# EAGLE board wiseboard (EAGLE 8.2.2)
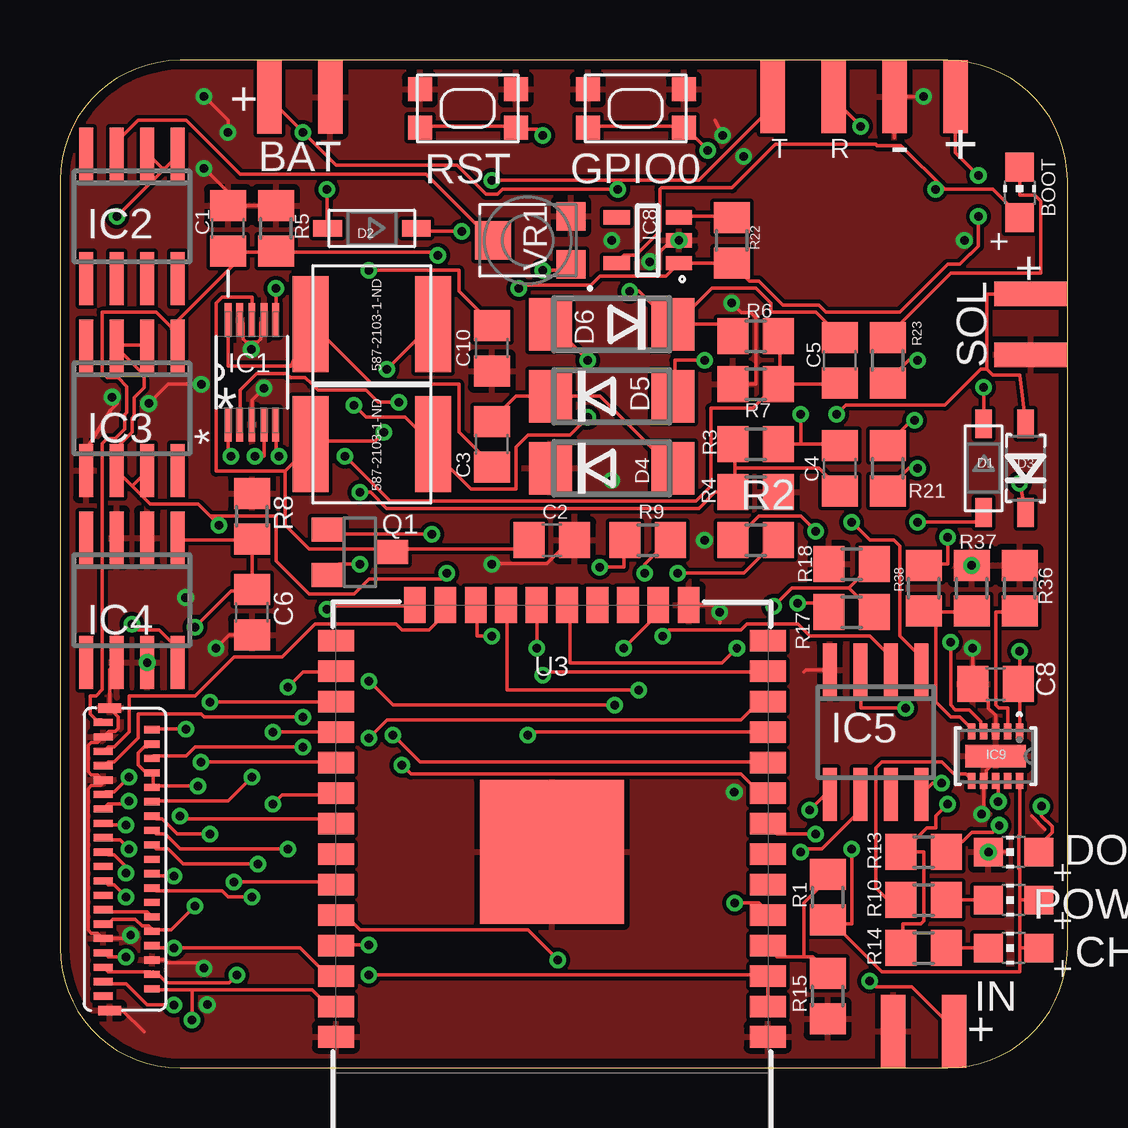
[diagram p0: board, top side]
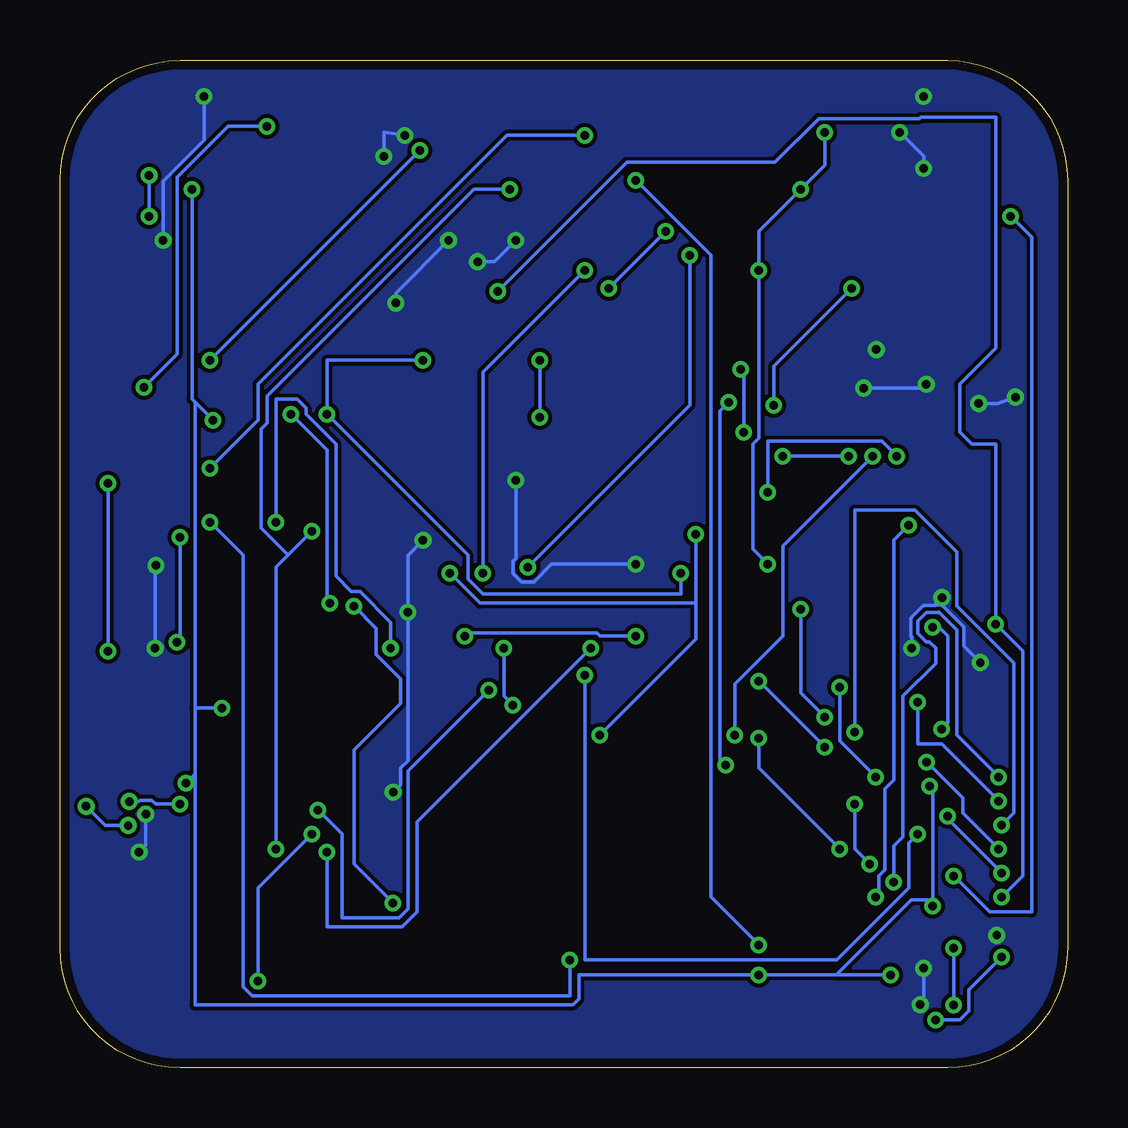
[diagram p1: board, bottom side, seen from below]

Size 42 x 42 mm. Coordinates in mm from the lower left corner, seen from the top.
Outline: 42,5 42,37 arc90 37,42 5,42 arc90 0,37 0,5 arc90 5,0 37,0 arc90 42,5
Copper layers (1*16): Top 0.0356mm / dielectric 1.5011mm / Bottom 0.0356mm
Design rules "oshpark-2layer": minimum track width 6mil, minimum drill 13mil, track to track 6mil, track to pad 6mil, pad to pad 6mil, via to via 6mil, smd to smd 6mil, copper to edge 15mil, drill to drill 6mil, minimum pad ring 7mil, minimum via ring 7mil, stop-mask expansion 2.5mil, vias tented up to drill 0mil, thermal gap 10mil

## Footprints (pad centres in the part's own frame; a part is rotated, then mirrored left to right if it is on the bottom)
587-2103-1-ND = smd 1.5 x 4: P$1 -2.55,0; P$2 2.55,0
CHIP-LED0805 = smd 1.2 x 1.2: A 0,-1.05; C 0,1.05
C0805 = smd 1.3 x 1.5: 1 -0.95,0; 2 0.95,0
SOD-123 = smd 1.2 x 0.7: A 1.85,0; C -1.85,0
DO214AA = smd 1.8 x 2.2: A 2.55,0; C -2.55,0
SOP50P490X110-10N = smd 1.397 x 0.279: 1 -2.184,0.991; 2 -2.184,0.508; 3 -2.184,0; 4 -2.184,-0.508; 5 -2.184,-0.991; 6 2.184,-0.991; 7 2.184,-0.508; 8 2.184,0; 9 2.184,0.508; 10 2.184,0.991
SO08 = smd 0.6 x 2.2: 1 -1.905,-2.6; 2 -0.635,-2.6; 3 0.635,-2.6; 4 1.905,-2.6; 5 1.905,2.6; 6 0.635,2.6; 7 -0.635,2.6; 8 -1.905,2.6
SO8 = smd 0.6 x 2.2: 1 -1.905,-2.6; 2 -0.635,-2.6; 3 0.635,-2.6; 4 1.905,-2.6; 5 1.905,2.6; 6 0.635,2.6; 7 -0.635,2.6; 8 -1.905,2.6
SOT95P280X145-5N = smd 1.1 x 0.6: 1 -1.3,0.95; 2 -1.3,0; 3 -1.3,-0.95; 4 1.3,-0.95; 5 1.3,0.95
DQC10_P84X2P4 = smd 0.66 x 0.305: 1 -1.029,1; 2 -1.029,0.5; 3 -1.029,0; 4 -1.029,-0.5; 5 -1.029,-1; 6 1.029,-1; 7 1.029,-0.5; 8 1.029,0; 9 1.029,0.5; 10 1.029,1 | smd 0.94 x 2.515: 11 0,0
EDGE_CON_2 = smd 1.016 x 3.048: 1 1.27,1.524; 2 -1.27,1.524
EDGE_CON_4 = smd 1.016 x 3.048: 1 2.54,0.254; 2 0,0.254; 3 -5.08,0.254; 4 -2.54,0.254
SOT23 = smd 1 x 1.4: 1 -0.95,-1.306; 2 0.95,-1.306; 3 0,1.306
R0805 = smd 1.3 x 1.5: 1 -0.95,0; 2 0.95,0
KMR2 = smd 1 x 1: 1 2,0.8; 2 2,-0.8; 3 -2,0.8; 4 -2,-0.8
ESP-WROOM-03 = smd 0.9 x 1.5: 1 7.7,9; 2 6.43,9; 3 5.16,9; 4 3.89,9; 5 2.62,9; 6 1.35,9; 7 0.08,9; 8 -1.19,9; 9 -2.46,9; 10 -3.73,9; 11 -5,9; 12 -6.27,9; 13 -7.54,9; 14 -8.81,9; 25 -8.81,-9; 26 -7.54,-9; 27 -6.27,-9; 28 -5,-9; 29 -3.73,-9; 30 -2.46,-9; 31 -1.19,-9; 32 0.08,-9; 33 1.35,-9; 34 2.62,-9; 35 3.89,-9; 36 5.16,-9; 37 6.43,-9; 38 7.7,-9 | smd 1.5 x 0.9: 15 -10.3,5.715; 16 -10.3,4.445; 17 -10.3,3.175; 18 -10.3,1.905; 19 -10.3,0.635; 20 -10.3,-0.635; 21 -10.3,-1.905; 22 -10.3,-3.175; 23 -10.3,-4.445; 24 -10.3,-5.715 | smd 6 x 6: GND 0,0
HFQ339CT-ND = smd 0.4 x 0.95: GND@1 6.6,-0.925; GND@2 -6,-0.925 | smd 0.3 x 0.8: P$1 -5.4,-1.2; P$3 -4.8,-1.2; P$5 -4.2,-1.2; P$7 -3.6,-1.2; P$9 -3,-1.2; P$11 -2.4,-1.2; P$13 -1.8,-1.2; P$15 -1.2,-1.2; P$17 -0.6,-1.2; P$19 0,-1.2; P$21 0.6,-1.2; P$23 1.2,-1.2; P$25 1.8,-1.2; P$27 2.4,-1.2; P$29 3,-1.2; P$31 3.6,-1.2; P$33 4.2,-1.2; P$35 4.8,-1.2; P$37 5.4,-1.2; P$39 6,-1.2 | smd 0.3 x 0.65: P$2 -5.1,0.838; P$4 -4.5,0.838; P$6 -3.9,0.838; P$8 -3.3,0.838; P$10 -2.7,0.838; P$12 -2.1,0.838; P$14 -1.5,0.838; P$16 -0.9,0.838; P$18 -0.3,0.838; P$20 0.3,0.838; P$22 0.9,0.838; P$24 1.5,0.838; P$26 2.1,0.838; P$28 2.7,0.838; P$30 3.3,0.838; P$32 3.9,0.838; P$34 4.5,0.838; P$36 5.1,0.838; P$38 5.7,0.838
TRIM_TC33X-2-103E = smd 1.2 x 1.2: 1 -1.8,1; 3 -1.8,-1 | smd 1.5 x 1.6: 2 1.45,0

## Placement (x,y rotation side)
22  587-2103-1-ND  [587-2103-1-ND]  13,31 180 top
BOOT  LED1  [CHIP-LED0805]  40,36.5 0 top
C1  1uF  [C0805]  7,35 90 top
C2  1uF  [C0805]  20.5,22 0 top
C3  1uF  [C0805]  18,26 90 top
C4  10uF  [C0805]  32.5,25 270 top
C5  10uF  [C0805]  32.5,29.5 270 top
C6  1uF  [C0805]  8,19 270 top
C8  10uF  [C0805]  39,16 0 top
C10  10uF  [C0805]  18,30 90 top
CHRG/LBO  LED3  [CHIP-LED0805]  39.75,5 90 top
D1  MBR120VLSFT1G  [SOD-123]  40.25,25 90 top
D2  MBR120  [SOD-123]  13,35 180 top
D3  1n4148  [SOD-123]  38.5,25 270 top
D4  SS24  [DO214AA]  23,25 0 top
D5  SS24  [DO214AA]  23,28 0 top
D6  SS24  [DO214AA]  23,31 180 top
DONE  LED4  [CHIP-LED0805]  39.75,9 90 top
IC1  LT1945  [SOP50P490X110-10N]  8,29 90 top
IC2  LM358  [SO08]  3,35.5 180 top
IC3  L79L15  [SO8]  3,27.5 180 top
IC4  L78L15  [SO8]  3,19.5 180 top
IC5  W25Q  [SO8]  34,14 180 top
IC8  IC6  [SOT95P280X145-5N]  24.5,34.5 180 top
IC9  BQ24210DQCT  [DQC10_P84X2P4]  39,13 270 top
J1  BAT_CON  [EDGE_CON_2]  10,42 180 top
J2  SOL_CON  [EDGE_CON_2]  42,31 90 top
J3  PROG_HEADER  [EDGE_CON_4]  32.25,40.75 180 top
J4  BUT_CON  [EDGE_CON_2]  36,0 0 top
POWERGOOD  LED2  [CHIP-LED0805]  39.75,7 90 top
Q1  IRLM  [SOT23]  12.5,21.5 270 top
R1  10K  [R0805]  32,7.12 270 top
R2  10k  [R0805]  29,22 0 top
R3  470k  [R0805]  29,26 0 top
R4  39k  [R0805]  29,24 180 top
R5  39k  [R0805]  9,35 90 top
R6  560k  [R0805]  29,30.5 180 top
R7  39k  [R0805]  29,28.5 0 top
R8  39k  [R0805]  8,23 270 top
R9  200k  [R0805]  24.5,22 0 top
R10  1K  [R0805]  36,7 180 top
R13  1K  [R0805]  36,9 180 top
R14  1K  [R0805]  36,5 180 top
R15  10K  [R0805]  32,3 90 top
R17  10K  [R0805]  33,19 180 top
R18  10K  [R0805]  33,21 0 top
R21  10K  [R0805]  34.5,25 90 top
R22  10K  [R0805]  28,34.5 90 top
R23  1K  [R0805]  34.5,29.5 90 top
R36  790  [R0805]  40,20 270 top
R37  10k  [R0805]  38,20 270 top
R38  7.6k  [R0805]  36,20 90 top
SW1  SPST_TACT-KMR2  [KMR2]  24,40 0 top
SW2  SPST_TACT-KMR2  [KMR2]  17,40 0 top
U3  ESP-WROOM-03  [ESP-WROOM-03]  20.5,9 270 top
U$4  FH26W-39S  [HFQ339CT-ND]  3,9 270 top
U$5  587-2103-1-ND  [587-2103-1-ND]  13,26 180 top
VR1  TC33X-104ECT-ND  [TRIM_TC33X-2-103E]  19.5,34.5 180 top

## Library data of the parts
22 D4-D6 IC3-IC5 IC8 J1-J4 U$4 U$5 = WISE
BOOT CHRG/LBO D2 D3 DONE POWERGOOD SW1 SW2 = adafruit
C1-C6 C8 C10 R1-R10 R13-R15 R17 R18 R21-R23 R36-R38 = resistor
D1 = microbuilder
IC1 = LTC_By_element14_Batch_1; MPN: LT1945EMS#PBF; OC_FARNELL: 1273495; OC_NEWARK: 57M7266; PACKAGE: MSOP-10; SUPPLIER: Linear Technology
IC2 = linear
IC9 = WISE; MANUFACTURER_PART_NUMBER: BQ24210DQCT; VENDOR: Vendor
Q1 = IRLML6402; AVAILABILITY: Unavailable; DESCRIPTION: MOSFETs, Semiconductors and Actives, mosfet, Transistors, Discretes (diodes, transistors, thyristors ...); MF: International Rectifier; MP: IRLML6402; PACKAGE: SOT-23-3 International Rectifier; PRICE: None
U3 = esp32
VR1 = WISE; AVAILABILITY: Good; DESCRIPTION: Res%20Trimmer%2010K%20Ohm%2025%25%200.1W%281/10W%29%201%28Elec%29/1%28Mech%29Turn%20%283%20X%203.8mm%29%20Foot%20Print%20SMD%20Embossed%20T/R; MF: Bourns; MP: TC33X-2-103E; PACKAGE: None; PRICE: 0.16 USD

## Nets
+3V3: BOOT.A IC5.3 IC5.8 IC8.5 R21.2 U3.2 U3.3 U$4.P$4 U$4.P$8 U$4.P$10 U$4.P$29 U$4.P$30 U$4.P$35 U$4.P$36
+5V: D2.C IC8.1 J3.3 R22.1
+15V: C6.1 IC4.1 R8.2 U$4.P$2
+22V: C5.1 D6.C IC4.8 R6.2 U$4.P$23
-15V: C1.1 IC3.1 R5.1 R9.1 U$4.P$1
-20V: C4.1 D5.A IC3.2 IC3.3 IC3.6 IC3.7 R3.2 U$4.P$24
BAT_SENS: R1.1 R15.2 U3.4
BUT_CON: J4.1 U3.8
CKV: U3.37 U$4.P$33 U$4.P$38
CL: U3.23 U$4.P$5
CLK: IC5.6 U3.20
D0: U3.26 U$4.P$12
D1: U3.27 U$4.P$13
D2: U3.13 U$4.P$14
D3: U3.28 U$4.P$15
D4: U3.12 U$4.P$16
D5: U3.29 U$4.P$17
D6: U3.30 U$4.P$18
D7: U3.31 U$4.P$19
ESP_DI: IC5.2 U3.22
ESP_DO: IC5.5 U3.21
FB2: C5.2 IC1.5 R6.1 R7.2
GMODE: U$4.P$27 U$4.P$28
GND: C1.2 C2.2 C6.2 C8.1 C10.1 D4.C DONE.C IC1.3 IC1.7 IC1.9 IC3.5 IC4.2 IC4.3 IC4.6 IC4.7 IC5.4 IC8.2 IC9.3 IC9.7 IC9.11 J1.2 J2.2 J3.4 J4.2 R4.1 R5.2 R7.1 R8.1 R15.1 R18.1 R36.1 R37.1 SW1.1 SW1.3 SW2.1 SW2.3 U3.1 U3.15 U3.38 U3.GND U$4.GND@1 U$4.GND@2 U$4.P$3 U$4.P$9 U$4.P$31 U$4.P$34 VR1.3
GPIO0: R23.1 SW1.2 SW1.4
IC5: IC5.1 U3.19
LE: U3.16 U$4.P$6
N$1: IC2.3 VR1.2
N$2: 22.P$2 C3.1 IC1.10
N$3: C8.2 D1.C IC9.1
N$4: 22.P$1 C2.1 IC1.8 Q1.3 U$5.P$2
N$5: D6.A IC1.6 U$5.P$1
N$6: C3.2 D4.A D5.C
N$7: U3.25
N$8: R9.2 VR1.1
N$9: IC9.6 R10.2
N$10: CHRG/LBO.C R14.1
N$11: POWERGOOD.C R10.1
N$14: DONE.A R13.1
N$15: IC9.8 R13.2 R14.2
N$17: IC9.2 R36.2
N$22: BOOT.C R23.2
N$23: IC8.3 R22.2
N$28: IC9.5 R37.2 R38.1
N$30: IC9.4 R38.2
N$37: U3.14
N$48: U3.6
N$49: U3.7
NEGEN: IC1.2 U3.9
NFB1: C4.2 IC1.1 R3.1 R4.2
OE: U3.24 U$4.P$7
PANEL: D1.A J2.1 R17.2
PANEL_SENS: R17.1 R18.2 U3.5
POSEN: IC1.4 U3.10
RESET: R21.1 SW2.2 SW2.4
RXD: D3.A U3.34
RXD_5V: D3.C J3.2
SPH: U3.33 U$4.P$11
SPV: U3.36 U$4.P$32 U$4.P$37
SUP_CTRL: Q1.1 R2.2 U3.11
TXD: J3.1 U3.35
V+: IC2.8
V-: IC2.4
VBAT: C10.2 CHRG/LBO.A D2.A IC9.10 J1.1 POWERGOOD.A Q1.2 R1.2 R2.1
VCOMMON: IC2.1 IC2.2 U$4.P$22

## Tracks (layer width: path | path; a pad name or v marks a point on that pad's centre or on a via)
+3V3  (via drill 0.35)
  Top 0.152: U3.2 U3.3 29.5,3.88 v12.88,3.88 | U$4.P$35 2,4 3.75,4 U$4.P$36 | 3.88,11.75 3.88,12.25 U$4.P$8 3.75,12.38 3.5,12.38 3.25,12.62 3.25,13.12 3.5,13.38 3.62,13.38 3.75,13.5 U$4.P$4 | v5.75,11.75 3.88,11.75 | v5.62,6.75 4.62,5.75 3.88,5.75 | 3.88,11.75 U$4.P$10 | 3.88,5.75 U$4.P$30 | 3.88,4 U$4.P$36 | 36.88,36.62 v36.5,36.62 | IC8.5 23.25,33.62 23.5,33.88 24,33.88 25,34.88 25,36.62 25.07,36.7 28.02,36.7 29.82,38.5 34,38.5 34.04,38.46 35.04,38.46 36.88,36.62 | BOOT.A 40,35.5 38.88,36.62 36.88,36.62 | v35.62,27 35.5,27 34.5,26 R21.2 | v36.75,11.88 36.38,11.88 36,11.5 IC5.8 | v35.25,15 33.38,15 33.38,16.5 IC5.3 | U$4.P$36 4.1,3.9 4.45,3.56 7.05,3.56 v7.38,3.88 | U$4.P$29 2,6 2.19,6.2 3.14,6.2 3.42,5.92 3.7,5.92 3.88,5.75
  Bottom 0.152: v5.75,11.75 5.62,11.62 5.62,7 | v5.62,6.75 5.62,7 | 9.64,3.88 v7.38,3.88 | 9.64,3.88 v12.88,3.88 20.38,3.88 20.38,2.88 20.62,2.62 36.38,2.62 36.38,12.25 | 36.38,27.75 36.5,27.88 v36.5,36.62 | 36.38,27.75 v35.62,27 | 36.38,12.25 v36.75,11.88 | 36.38,27.75 36.38,15 | 36.38,15 36.38,12.25 | 36.38,15 v35.25,15 | 5.62,7 6.51,7 9.64,3.88
+5V  (via drill 0.35)
  Top 0.152: v16.75,34.88 15,34.88 14.88,35 D2.C | v19.12,32.5 19.25,32.62 22.12,32.62 22.5,33 25.25,33 IC8.1 R22.1 28.75,32.8 29.13,32.8 30.13,31.8 31.63,31.8 31.93,31.5 35,31.5 37,33.5 37.5,33.5 37.92,33.92 37.95,33.92 38.29,34.26 v38.29,35.5 | 37.25,40.38 J3.3 37.33,38.16 v38.29,37.21
  Bottom 0.152: v19.12,32.5 v16.75,34.88 | v38.29,37.21 v38.29,35.5
+15V  (via drill 0.35)
  Top 0.152: v5.25,14.12 3.88,14.12 U$4.P$2 | v5.62,18.38 7.12,19.88 8,19.88 C6.1 8,22 | 8,22 5,22 IC4.1 | 8,22 R8.2
  Bottom 0.152: v5.62,18.38 5.38,18.38 5,18 5,14.38 v5.25,14.12
+22V  (via drill 0.35)
  Top 0.152: 25.67,31 D6.C 25.5,31 24.12,32.38 v23.75,32.38 | 25.67,31 27.5,31 28,30.5 R6.2 28.12,30.5 | C5.1 32.5,30.5 31.5,31.5 29.62,31.5 29.62,31.88 29,32.5 27.17,32.5 25.67,31 | v2.75,7.12 2.25,7.62 2,7.62 1.88,7.75 U$4.P$23 | v3,18.5 3.25,18.25 4.12,18.25 4.88,17.5 4.88,17 IC4.8
  Bottom 0.152: v2.75,7.12 1.88,8 1.88,17.38 v3,18.5 3,26 4,26 4.5,26.5 4.5,28.5 3,30 3,39.62 6.12,39.62 6.17,39.58 10.37,39.58 12.2,37.75 18.38,37.75 v23.75,32.38
-15V  (via drill 0.35)
  Top 0.152: 4.62,30.88 4.88,30.62 4.88,30.12 IC3.1 4.62,30.88 | 4.62,30.88 4,31.5 1.75,31.5 1.75,28.99 1.97,28.77 2.42,28.77 2.79,28.41 2.79,27.32 2.69,27.23 2.69,26.63 2.3,26.23 1.97,26.23 1.77,26.03 1.77,15.77 1.5,15.5 1.25,15.5 1.25,14.75 1.5,14.5 1.75,14.5 U$4.P$1 | 9,34 7.75,34 | 7.75,34 7,34 C1.1 | v22.5,20.88 23.5,20.88 23.5,22 R9.1 | v15.75,33.88 15.62,34 9,34 | 9,34 R5.1 | 7.75,34 4.62,30.88
  Bottom 0.152: v22.5,20.88 15.75,27.62 v15.75,33.88
-20V  (via drill 0.35)
  Top 0.152: R3.2 30.88,26 | 30.88,26 32.5,26 C4.1 | v26.88,29.5 25.62,29.5 25.62,28 D5.A | 30.88,26 v30.88,27.25 | IC3.2 3.62,30.12 2.38,30.12 IC3.3 2.38,30 3.38,29 3.5,29 3.5,28.36 3.09,27.95 3.09,27.2 3,27.1 3,26.5 2.37,25.86 IC3.6 | v8,7.12 7,7.12 6.75,7.38 4,7.38 3.88,7.5 U$4.P$24 | 6.25,23 5.75,23.5 3.75,23.5 3,24.25 | 6.25,23 v6.62,22.62 | 3,24.25 2.38,24.88 IC3.6 | 3,24.25 3.62,24.88 IC3.7 | 2.38,25 IC3.6 | v16.12,20.62 15.88,20.38 12.88,20.38 12.25,19.75 10.38,19.75 9,21.12 9,23 6.25,23
  Bottom 0.152: v26.88,29.5 30.88,29.5 v30.88,27.25 25,21.38 25,20.38 24.38,19.75 16.12,19.75 v16.12,20.62 | v8,7.12 7.88,7.25 7.88,8 7.62,8.25 7.62,11.62 7.25,12 7.25,22 v6.62,22.62
BAT_SENS
  Top 0.152: 31,4.62 31.38,4.62 32,4 R15.2 | 31,4.62 29.88,4.62 29.5,5 U3.4 | 31,4.62 31,6.88 32,7.88 R1.1
BUT_CON  (via drill 0.35)
  Top 0.152: v31.5,9.75 29.88,9.75 29.5,10.12 U3.8 | v33.75,3.62 34,3.38 35.5,3.38 37.25,1.62 J4.1
  Bottom 0.152: v31.5,9.75 33.75,7.5 v33.75,3.62
CKV  (via drill 0.35)
  Top 0.152: 5.5,3.25 10.5,3.25 11.12,2.62 11.5,2.62 U3.37 | 5.5,3.25 3.88,3.25 U$4.P$38 | v2.75,4.62 2,4.62 1.88,4.75 U$4.P$33 | 5.5,3.25 v5.5,2
  Bottom 0.152: v2.75,4.62 4.12,3.25 4.12,2.38 4.5,2 v5.5,2
CL
  Top 0.152: U$4.P$5 1.88,13.25 2,13.38 2.25,13.38 2.88,14 2.88,15.5 5.62,15.5 7.25,17.12 9.25,17.12 10.62,18.5 14,18.5 14.25,18.25 15.38,18.25 16,18.88 16,19.25 U3.23
CLK  (via drill 0.35)
  Top 0.152: v19.88,17.5 19.88,19.25 U3.20 | v30.88,9 31,9.12 31.75,9.12 33.25,10.62 33.25,11.38 IC5.6
  Bottom 0.152: v19.88,17.5 27.12,10.25 27.12,6.5 27.75,5.88 30.88,5.88 v30.88,9
D0  (via drill 0.35)
  Top 0.152: v8,12.12 7,11.12 3.88,11.12 U$4.P$12 | v9.5,15.88 10.12,16.5 11.5,16.5 U3.26
  Bottom 0.152: v8,12.12 9.5,13.62 v9.5,15.88
D1  (via drill 0.35)
  Top 0.152: U$4.P$13 2,11 2.75,11 v2.88,11.12 | v6.25,15.25 11.5,15.25 U3.27
  Bottom 0.152: v2.88,11.12 5.25,13.5 6.25,13.5 v6.25,15.25
D2  (via drill 0.35)
  Top 0.152: v6.25,9.75 4.88,9.75 4.25,10.38 4,10.38 3.88,10.5 U$4.P$14 | v20.12,16.38 20.25,16.5 29.5,16.5 U3.13
  Bottom 0.152: v6.25,9.75 6.62,9.38 6.62,7.5 9.62,4.5 20.12,4.5 v20.12,16.38
D3  (via drill 0.35)
  Top 0.152: v2.75,10.12 1.88,10.12 U$4.P$15 | U3.28 v8.88,14
  Bottom 0.152: v2.75,10.12 2.25,10.62 2.25,16.88 4.62,19.25 4.62,21.5 6.38,23.25 8.88,23.25 v8.88,14
D4  (via drill 0.35)
  Top 0.152: v9.5,9.12 5,9.12 4.38,9.75 4,9.75 3.88,9.88 U$4.P$16 | v12.88,13.75 13.62,14.5 28.38,14.5 29.12,15.25 29.5,15.25 U3.12
  Bottom 0.152: v9.5,9.12 12.88,12.5 v12.88,13.75
D5  (via drill 0.35)
  Top 0.152: v2.88,9.12 2.5,9.5 1.88,9.5 U$4.P$17 | v5.88,12.75 11.5,12.75 U3.29
  Bottom 0.152: v2.88,9.12 4.38,10.62 4.38,11.25 v5.88,12.75
D6  (via drill 0.35)
  Top 0.152: v8.25,8.5 5.12,8.5 4.5,9.12 4,9.12 3.88,9.25 U$4.P$18 | v8.88,11 9.25,11.38 11.5,11.38 U3.30
  Bottom 0.152: v8.25,8.5 8.88,9.12 v8.88,11
D7  (via drill 0.35)
  Top 0.152: v2.75,8.12 2.75,8.38 2.25,8.88 2,8.88 1.88,9 U$4.P$19 | v5,10.5 5.12,10.38 11.38,10.38 11.5,10.25 U3.31
  Bottom 0.152: v2.75,8.12 5,10.38 v5,10.5
ESP_DI  (via drill 0.35)
  Top 0.152: v18,18 17.38,18 17.38,19.25 U3.22 | v25.12,18 25.38,18.25 28.38,18.25 28.62,18.5 30.75,18.5 31.25,18 33.75,18 34.62,17.12 34.62,16.62 IC5.2
  Bottom 0.152: v18,18 19.5,18 19.62,18.12 25.12,18.12 v25.12,18
ESP_DO  (via drill 0.35)
  Top 0.152: v24.12,15.75 18.62,15.75 18.62,19.25 U3.21 | v31.25,10.75 31.88,11.38 32,11.38 IC5.5
  Bottom 0.152: v24.12,15.75 27.5,12.38 27.5,6.62 27.88,6.25 30.25,6.25 30.25,9.75 v31.25,10.75
FB2  (via drill 0.35)
  Top 0.152: v9.12,25.5 9,25.5 9,26.75 IC1.5 | v11.88,25.5 13.75,23.62 26.5,23.62 27.12,24.25 27.12,27.5 28.88,27.5 29.88,28.5 R7.2 30,28.5 | 30,28.5 30,30.5 R6.1 | 30,28.5 32.5,28.5 C5.2
  Bottom 0.152: v11.88,25.5 v9.12,25.5
GMODE
  Top 0.152: U$4.P$28 3.75,6.38 3.62,6.5 1.88,6.5 U$4.P$27
GND  (via drill 0.35)
  Top 0.152: 34.79,38.79 J3.4 v36,40.5 | v27.62,38.88 27.3,39.5 | IC8.2 25.48,34.5 v24.59,33.61 | IC4.6 2.08,16.61 U$4.GND@2 2.43,14.64 2.43,14.15 2.29,14.02 2.02,14.02 U$4.P$3 1.58,13.58 1.3,13.58 1.17,13.45 1.17,12.36 1.3,12.22 1.58,12.22 U$4.P$9 1.8,11.88 1.71,11.78 1.7,11.78 1.3,11.78 1.17,11.64 1.17,5.75 1.3,5.62 1.58,5.62 U$4.P$31 2.81,5.4 v2.95,5.53 | U$4.GND@1 2.6,2.4 3.5,1.5 | U$4.P$34 4.39,4.5 4.5,4.39 5.77,4.39 v6,4.16 | U3.15 27.2,19.3 v27.5,19 27.5,18.55 | IC5.4 31.1,16.6 31,16.5 | 41.05,9.95 40.5,10.5 | IC9.11 39,12.78 38.62,12.4 38.62,12.09 IC9.7 38.5,10.66 v38.42,10.58 | IC9.3 39,14.69 38.7,15 38.7,15.36 C8.1 38.05,17.48 v38.03,17.5 | R5.2 C1.2 7,36.5 v6,37.5 | v7,39 7,39.5 v6,40.5 | C2.2 21.27,22 20.3,21.02 18.02,21.02 v18,21 | 8,30.26 7.77,30.26 7.63,30.39 7.63,31.05 IC1.9 | 8,30.26 8.23,30.26 8.37,30.39 8.37,31.05 IC1.7 | 8,30.26 8,29.98 v7.97,29.95 | IC1.3 8,27.84 v8.5,28.34 | C6.2 7.05,18.05 v6.5,17.5 | v5.89,28.5 4.5,28.5 v3.7,27.7 3.5,27.5 | 2.39,27.69 2.11,27.42 1.09,25.78 IC3.5 | R7.1 29,28.5 29,31.27 28.8,31.48 28.41,31.48 v28,31.89 | DONE.C 39.5,9 | v37.71,34.5 37.68,34.5
  Bottom 0.152: v28.5,38 28.5,39 v27.62,38.88 | v24.59,33.61 23.89,33.61 v23,34.5 | v6,4.16 6,2.79 v6.14,2.64 | v28.11,11.5 27.8,11.8 27.8,12.5 27.5,12.81 v27.5,19 27.5,21.37 v26.87,22 | v6,37.5 6,38 v7,39 | v38.03,17.5 38.03,20.92 R37.1 | v23,24.5 23,21.23 23.11,21.13 23.11,20.62 22.75,20.27 22.25,20.27 21.52,21 v18,21 | v8.5,28.34 6.05,28.34 v5.89,28.5 | v6.5,17.5 6.5,17.96 6.54,18 6.54,18.75 6,19.29 5.55,19.29 | 5.55,19.29 v5.23,19.61 | IC4.7 4.32,17.59 4.32,18.38 5.25,19.3 5.5,19.3 5.52,19.29 5.55,19.29 | v3.7,27.7 2.91,27.7 v2.17,27.96 | v28,31.89 28,32.3 IC8.2 | v38.42,10.58 38.42,9.28 DONE.C | v36,40.5 36,38.68 37.71,36.98 v37.71,34.5
  other vias: 38,20.95 3.63,16.9 25.8,34.5 38.7,9
  pour Top: 0,0 0,41.5 0,42 42,42 42,0
  pour Bottom: -0.5,42 42,42 42,-0.5 -0.5,-0.5
GPIO0  (via drill 0.35)
  Top 0.152: SW1.4 22,39.25 26,39.25 SW1.2 26,39.12 26.12,39.12 v27,38.25 | v35.75,29.5 35.38,29.5 34.5,28.62 R23.1
  Bottom 0.152: v27,38.25 v35.75,29.5
IC5  (via drill 0.35)
  Top 0.152: v33,22.75 33.75,22 34.75,22 35,21.75 35,18 35.88,17.12 35.88,16.62 IC5.1 | U3.19 21.25,19.25 21.25,16.88 27.59,16.88 v28.22,17.5
  Bottom 0.152: v33,22.75 33,27.88 32.12,27.88 31.75,27.5 31.75,27.25 30.5,26 30.5,20.5 29.86,19.86 29.5,19.86 28.22,18.58 v28.22,17.5
LE  (via drill 0.35)
  Top 0.152: v10.12,13.38 5.62,13.38 5.25,13 3.88,13 U$4.P$6 | v12.88,16.12 13.88,15.12 v23.12,15.12 | v23.5,17.5 24.88,18.88 24.88,19.25 U3.16
  Bottom 0.152: v12.88,16.12 v10.12,13.38 | v23.12,15.12 23.5,15.5 v23.5,17.5
N$1
  Top 0.152: VR1.2 18,34.5 15.25,37.25 7.5,37.25 5.25,39.5 3.25,39.5 2.38,38.62 2.38,38.12 IC2.3
N$2
  Top 0.152: IC1.10 7,31.12 7,29.25 9.62,29.25 10.38,31 22.P$2 10.5,31 13,28.5 16.62,28.5 16.62,26.5 18,25.12 C3.1
N$3  (via drill 0.35)
  Top 0.152: 40,16 IC9.1 | v40,24.38 D1.C | 40,16 v40,17.38 | 40,16 C8.2
  Bottom 0.152: v40,17.38 v40,24.38
N$4  (via drill 0.35)
  Top 0.152: C2.1 19.5,22 19.12,21.62 14,21.62 13.88,21.5 Q1.3 13.75,21.5 13.62,21.62 10.38,21.62 9.38,22.62 9.38,24.88 | IC1.8 8,32.12 6.75,32.12 6.5,31.88 6.5,24.88 9.38,24.88 | 10.5,26 9.38,24.88 | v13.62,29.12 15.5,31 22.P$1 | v13.5,26.5 13.12,26.12 10.62,26.12 10.5,26 | 10.5,26 U$5.P$2
  Bottom 0.152: v13.62,29.12 13.5,29 v13.5,26.5
N$5  (via drill 0.35)
  Top 0.152: v9,32.5 9,31.25 IC1.6 | v12.25,27.62 12.75,27.12 14.38,27.12 15.5,26 U$5.P$1 15.62,26 15.62,25.62 17.12,24.12 19,24.12 19,25.88 19.5,26.38 21.25,26.38 v22,27.12 | v22,29.5 20.5,31 D6.A
  Bottom 0.152: v9,32.5 12.25,29.25 v12.25,27.62 | v22,27.12 v22,29.5
N$6
  Top 0.152: C3.2 18,27 19,28 D5.C 22.5,28 25.5,25 D4.A
N$8  (via drill 0.35)
  Top 0.152: v20.12,33.25 21,33.25 21.25,33.5 VR1.1 | v24.38,20.62 24.38,21 25.38,22 R9.2
  Bottom 0.152: v20.12,33.25 24.38,29 v24.38,20.62
N$9
  Top 0.152: IC9.6 38,12 37.75,12.25 37.25,12.25 36.75,12.75 34.25,12.75 34,12.5 34,7.5 34.5,7 R10.2
N$10
  Top 0.152: R14.1 CHRG/LBO.C
N$11
  Top 0.152: R10.1 POWERGOOD.C
N$14  (via drill 0.35)
  Top 0.152: DONE.A 40.8,9.27 41.35,9.82 41.35,10.08 40.91,10.52 v40.91,10.91 | v39.16,10.11 38.88,9.83 38.01,9.83 37.18,9 R13.1
  Bottom 0.152: v39.16,10.11 40.1,10.11 v40.91,10.91
N$15  (via drill 0.35)
  Top 0.152: 35.12,9 36.12,10 36.5,10 36.5,10.5 v37,11 | 35.12,9 36,9 36,6.12 35.88,6 35.12,6 35.12,5 R14.2 | 35.12,9 R13.2 | v39.11,11.11 39.11,11.87 IC9.8
  Bottom 0.152: v37,11 38.02,11 38.18,11.16 38.66,11.16 38.72,11.11 v39.11,11.11
N$17
  Top 0.152: IC9.2 39.5,15 39.12,15 39,15.12 39,19 40,19 R36.2
N$22
  Top 0.152: BOOT.C 40,36.38 40.62,36.38 40.88,36.12 40.88,33.12 37.12,33.12 34.5,30.5 R23.2
N$23
  Top 0.152: IC8.3 25.88,35.5 28,35.5 R22.2
N$28
  Top 0.152: 36.5,19 36.5,15.25 37.12,14.62 37.5,14.62 38,14.12 IC9.5 | 36.5,19 36,19 R38.1 36.5,19 | 36.5,19 38,19 R37.2
N$30  (via drill 0.35)
  Top 0.152: v37.12,17.75 37.12,15.12 37.32,14.93 37.91,14.93 38.38,14.45 38.38,14.15 IC9.4 | v37,22.12 37,21 36,21 R38.2
  Bottom 0.152: v37.12,17.75 37,17.88 v37,22.12
NEGEN  (via drill 0.35)
  Top 0.152: v14.12,27.75 13.25,27.75 12.75,28.25 10.75,28.25 10.5,28.5 10.23,28.77 9.61,28.77 9.47,28.91 9.47,28.95 8.2,28.95 7.5,28.25 7.5,26.88 IC1.2 | v14.25,12.62 14.62,12.25 28.38,12.25 29.12,11.5 29.5,11.5 U3.9
  Bottom 0.152: v14.12,27.75 14.5,27.38 14.5,12.88 v14.25,12.62
NFB1  (via drill 0.35)
  Top 0.152: v7.12,25.5 7,25.5 7,26.75 IC1.1 | 28,24 R4.2 | 28.12,25 28.12,24 R4.2 | 28.12,25 28.12,26 R3.1 | 28.12,25 31.62,25 32.5,24.12 C4.2 | R4.2 27.31,24 26.63,23.32 13.62,23.32 12.94,24 v12.5,24
  Bottom 0.152: v7.12,25.5 7.75,26.12 12.5,26.12 v12.5,24
OE  (via drill 0.35)
  Top 0.152: v10.12,14.62 6,14.62 5.88,14.75 3.25,14.75 3.25,13.75 2.25,12.75 2,12.75 1.88,12.62 U$4.P$7 | v11.12,19.12 11.25,19.25 14.75,19.25 U3.24
  Bottom 0.152: v10.12,14.62 11.12,15.62 v11.12,19.12
PANEL  (via drill 0.35)
  Top 0.152: D1.A 40,28.88 38.88,28.88 38.62,29.12 | 38.62,29.12 38.62,32.25 40.38,32.25 J2.1 | v30.75,19.38 31.62,19.38 32,19 R17.2 | v32.38,27.25 32.75,27.62 36.88,27.62 38.38,29.12 38.62,29.12
  Bottom 0.152: v30.75,19.38 30.88,19.5 30.88,25.75 v32.38,27.25
PANEL_SENS  (via drill 0.35)
  Top 0.152: v28.12,6.88 29.12,6.88 29.5,6.5 U3.5 | v29.75,19.25 30.5,20 32.88,20 | 32.88,20 33.88,21 R18.2 | 32.88,20 33.88,19 R17.1
  Bottom 0.152: v28.12,6.88 29.75,8.5 29.75,13.25 27.8,15.2 27.8,16.23 28.83,17.25 28.83,18.33 v29.75,19.25
POSEN  (via drill 0.35)
  Top 0.152: v8.12,25.5 8.5,25.5 8.5,26.75 IC1.4 | v13.88,13.88 15,12.75 29.5,12.75 U3.10
  Bottom 0.152: v8.12,25.5 11.88,21.75 11.88,18 13.88,16 v13.88,13.88
RESET  (via drill 0.35)
  Top 0.152: SW2.4 15,39.25 19,39.25 SW2.2 19,39.12 19.88,39.12 v20.12,38.88 | v35.75,25 35.38,25 34.5,24.12 R21.1
  Bottom 0.152: v35.75,25 33.75,27 33.75,28.5 23.38,38.88 v20.12,38.88
RXD  (via drill 0.35)
  Top 0.152: v35.75,22.75 38.12,22.75 38.5,23.12 D3.A | v20.75,4.5 19.5,5.75 12.5,5.75 11.88,6.38 U3.34
  Bottom 0.152: v35.75,22.75 34.38,21.38 34.38,3.38 34,3 20.75,3 v20.75,4.5
RXD_5V  (via drill 0.35)
  Top 0.152: v38.5,28.38 D3.C | v33.38,39.25 32.25,40.38 J3.2
  Bottom 0.152: v38.5,28.38 37.12,29.75 37.12,37.12 35,39.25 v33.38,39.25
SPH  (via drill 0.35)
  Top 0.152: v2.88,12.12 2.25,11.5 1.88,11.5 U$4.P$11 | v7.25,7.75 11.5,7.75 U3.33
  Bottom 0.152: v2.88,12.12 4.62,13.88 4.62,18.25 5.38,19 5.39,18.98 5.88,18.98 6.23,18.63 6.23,18.12 5.88,17.77 5.77,17.77 5.5,17.5 5.5,16.86 6.86,15.5 6.86,9.64 7.25,9.25 v7.25,7.75
SPV  (via drill 0.35)
  Top 0.152: U$4.P$32 3.88,5 v4.75,5 10,5 11.12,3.88 11.5,3.88 U3.36 | v4.75,2.62 3.62,2.62 2.75,3.5 1.88,3.5 U$4.P$37
  Bottom 0.152: v4.75,5 v4.75,2.62
SUP_CTRL  (via drill 0.35)
  Top 0.152: v15.5,22.25 11.38,22.25 11.25,22.38 Q1.1 | v19.5,13.88 19.62,14 U3.11 | v25.75,20.62 28.5,20.62 29.88,22 R2.2
  Bottom 0.152: 15.5,19.38 15.5,17.88 v19.5,13.88 | 15.5,19.38 v15.5,22.25 | v25.75,20.62 24.5,19.38 15.5,19.38
TXD  (via drill 0.35)
  Top 0.152: v12.88,5.12 11.5,5.12 U3.35 | v18,37 26.62,37 29.62,40 29.62,40.38 J3.1
  Bottom 0.152: v12.88,5.12 14.88,7.12 14.88,33.88 v18,37
VBAT  (via drill 0.35)
  Top 0.152: 40,5.03 40,6.97 | 40,5.03 40,4 34.25,4 32.25,6 | 32.25,6 32,6 R1.2 32.25,6 | v31.5,22.38 30.88,23 29.12,23 28.12,22 R2.1 | v33,9.12 33,6 32.25,6 | v11.12,36.62 11.12,35 D2.A | J1.1 8.75,40.38 v10.12,39 11.5,37.62 16.55,37.62 17.76,36.42 18.24,36.42 18.45,36.62 v23.25,36.62 | v12.5,21 11.62,21 11.25,20.62 Q1.2 | v12.88,33.25 16.62,33.25 16.62,32.38 18,31 C10.2 | POWERGOOD.A 40.03,7 40,6.97 | CHRG/LBO.A 40.03,5 40,5.03 | 40,6.97 40,8.28 39.97,8.3 39.97,9.7 40,9.72 IC9.10
  Bottom 0.152: 32.5,21.38 33,20.88 v33,9.12 | 32.5,21.38 v31.5,22.38 | v10.12,39 10.12,37.62 v11.12,36.62 12.88,34.88 v12.88,33.25 12.88,26.25 13.12,26 13.12,21.62 v12.5,21 | 32.5,21.38 33.62,22.5 33.62,26.62 33.38,26.88 33.38,28 24.75,36.62 v23.25,36.62
VCOMMON  (via drill 0.35)
  Top 0.152: v4.75,8 3.88,8 U$4.P$22 | 4.38,37.5 4.88,38 IC2.1 | 4.38,37.5 v2.38,35.5 | 4.38,37.5 4.25,37.5 3.75,38 IC2.2
  Bottom 0.152: v4.75,8 3.25,6.5 1.5,6.5 1.5,34.62 v2.38,35.5

## Text on the board
tPlace: T | R | BAT | RST | GPIO0 | - | + | SOL | * | IN
bStop: Board by